# Altium PCB SPEC_A7_Management.PCBDOC (part 4 of 4)
Units mm, origin at the board's own origin, x right, y up, seen from the top; angles counter-clockwise.
Board outline 141.1 x 65.84 mm, 4 copper layers (Top Layer, Layer 1, Layer 2, Bottom Layer), stack 1.566 mm thick; 177 components, 176 nets, 698 pads, 409 vias.
Unrouted connection lines stored in the file: 4.
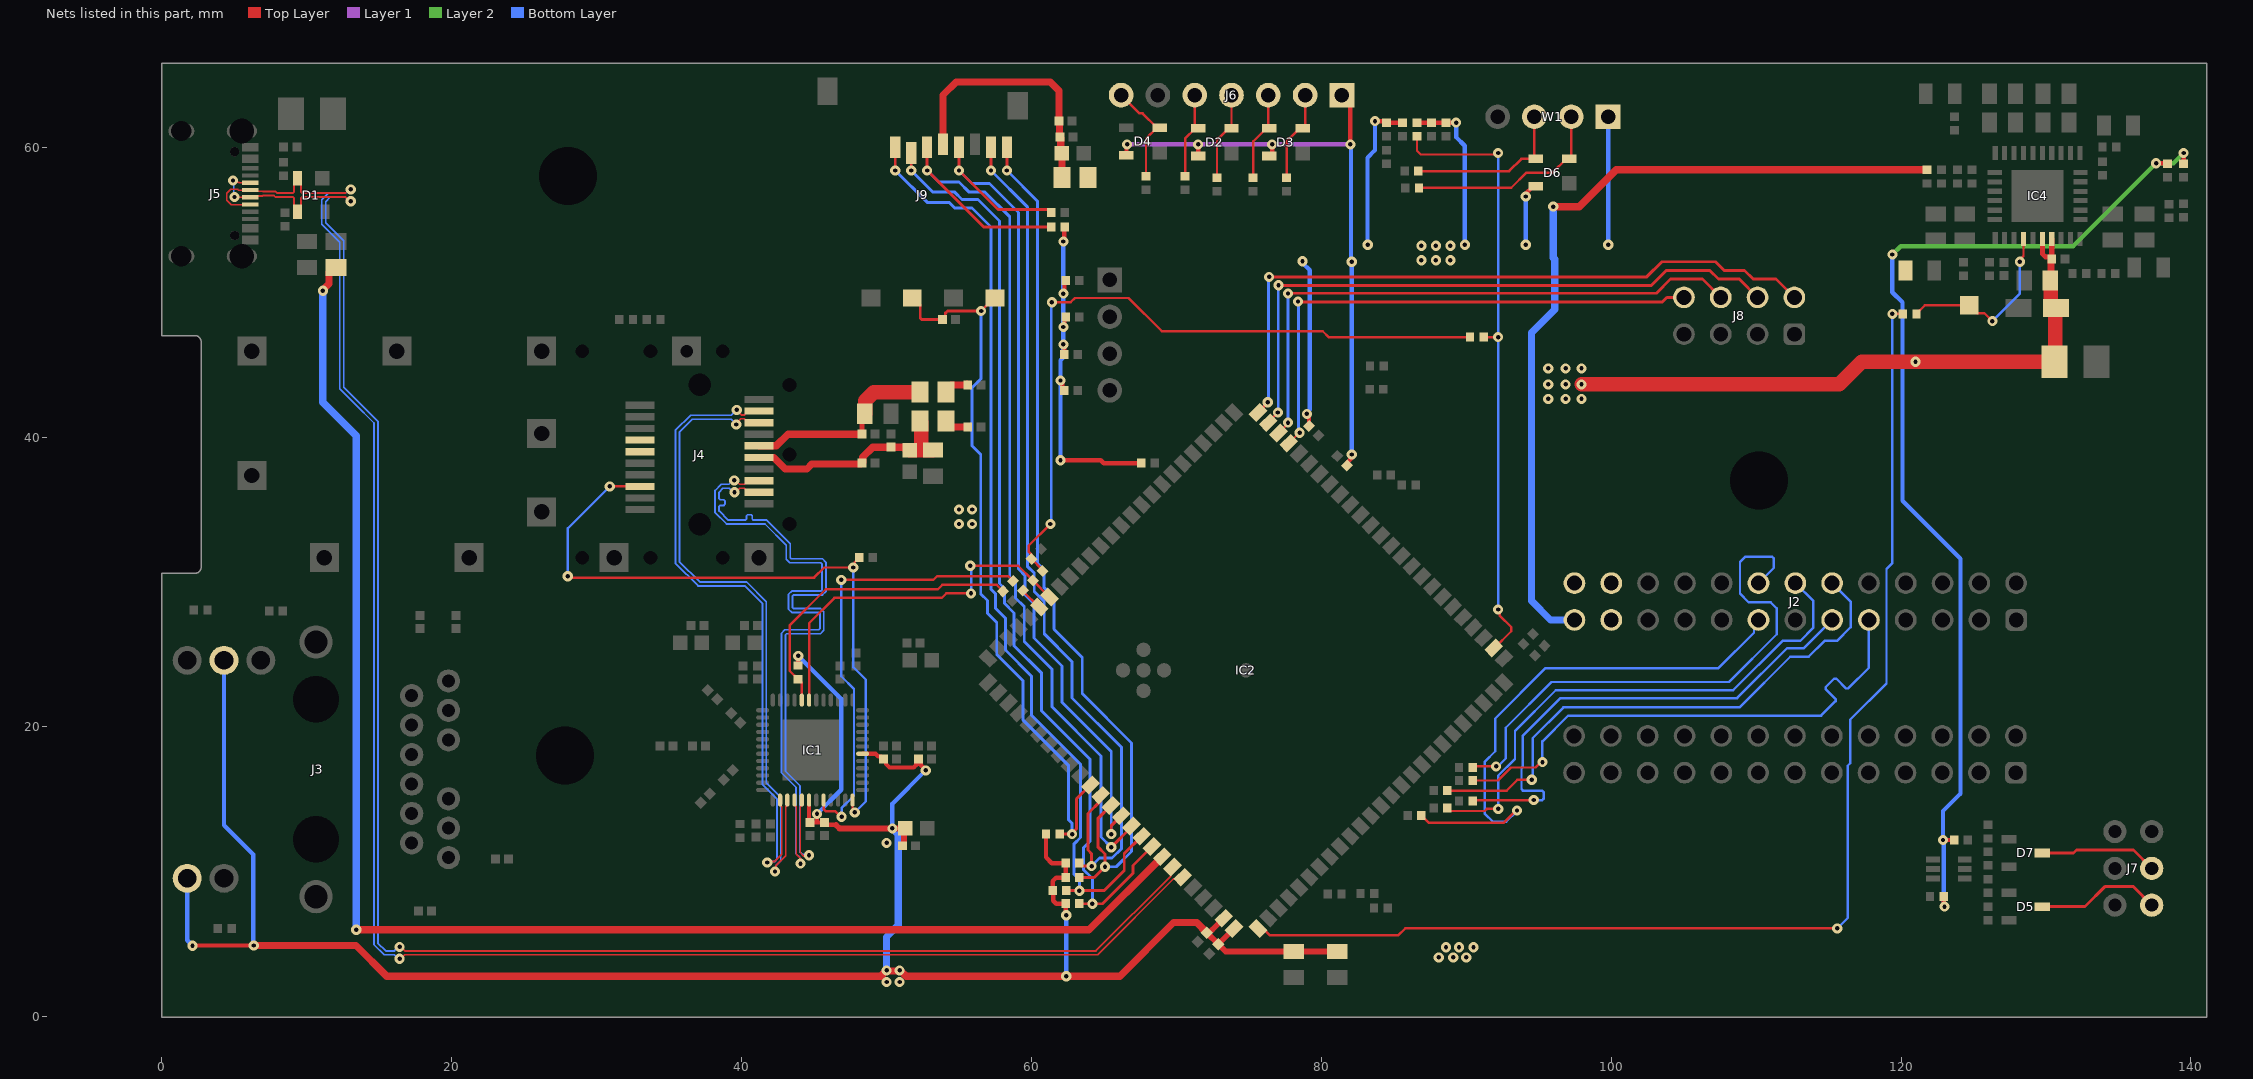
[diagram p5: the nets of this part, all layers, seen from the top]

## Via types
v1: diameter 0.7, hole 0.3, Top Layer to Bottom Layer, tented both sides, 409 vias

## Nets (pads, with @x,y where several pads share a name; then routed paths per layer and width w, separated by ;. In a path a pad name is that pad's centre, name@x,y a point inside that pad or via, vN(x,y) a via of type N, cw(c..) or ccw(c..) an arc to the next point about the centre after c; other vN are vias at no path point) (continued)
P3V3: C31.2 C34.2 J2.25 L1.1 L2.1 R38.2 | length 62.1
  Top Layer w0.5: L2.1@53.96,43.24 L2.1@54.1,43.1 54.1,43.25 54.45,43.6 C31.2@55.6,43.6 C31.2@55.54,43.66 ; L1.1@54.1,41.1 54.1,41.025 54.425,40.7 C34.2@55.6,40.7 ; v1(96,55.9) 97.8,55.9 100.34,58.44 R38.2@121.8,58.44
  Bottom Layer w0.5: v1(96,55.9) 96,52.373 96.1,52.273 96.1,48.8 94.5,47.2 94.5,28.7 95.815,27.385 97.462,27.385 J2.25@97.465,27.381
  other v1: 55,34 55.9,34 55,35 55.9,35
P3V3_SD: C42.2 C60.2 C61.2 J9.4 L4.2 | length 18.1
  Top Layer w0.5: J9.4@53.9,60.2 53.9,63.6 54.8,64.5 61.3,64.5 61.9,63.9 C61.2@61.9,61.8 61.925,61.775 61.925,60.725 C60.2@61.95,60.7 62.01,60.64 62.01,59.69 C42.2@62.1,59.6 L4.2@62.1,57.9
P3V3_SoM: C5.2 C6.2 C10.2 C11.2 C12.2 C13.2 C43.2 C44.2 C45.2 C46.2 D2.4 D3.4 D4.4 D6.4 IC1.18 IC1.30 IC2.49 IC2.50 J3.14 J3.16 J6.1 L4.1 R2.2 R7.2 R8.2 R17.1 R19.1 R20.1 R22.1 R23.1 R28.2 R29.2 R30.2 R31.2 R32.2 R35.2 R36.2 R50.2 R71.1 R72.2 R75.2 R79.2 R80.2 R81.2 R82.2 R83.2 W1.1 | length 357.6
  Top Layer w0.3: v1(2.1,4.9) 2.114,4.914 v1(6.333,4.914) ; R2.2@43.9,24.24 v1(43.9,24.9) ; IC1.18@44.65,14.95 44.65,13.45 C6.2@44.7,13.4 45.2,13.4 ; v1(45.2,14) 45.2,13.4 ; 46.5,13.24 45.86,13.24 C13.2@45.7,13.4 45.2,13.4 ; IC1.30@48.35,18.15 49.23,18.15 49.42,17.96 49.64,17.96 C5.2@49.8,17.8 ; C5.2@49.96,17.64 49.96,17.44 50.2,17.2 51.864,17.2 52.04,17.376 52.04,17.64 C12.2@52.2,17.8 52.36,17.64 52.36,17.376 52.7,17.036 v1(52.7,17) ; R71.1@61,12.6 61,11 61.4,10.6 R80.2@62.36,10.6 R81.2@62.36,9.6 61.7,9.6 61.46,9.36 R82.2@61.46,8.7 61.5,8.66 61.5,8 61.7,7.8 R83.2@62.36,7.8 62.36,7.04 v1(62.4,7) ; v1(62,38.4) 64.782,38.4 64.982,38.2 R23.1@67.56,38.2 ; v1(62,43.9) 62.12,43.78 62.12,43.34 R17.1@62.26,43.2 ; v1(62.2,46.4) 62.26,46.34 R19.1@62.26,45.7 ; v1(62.2,47.6) 62.277,47.677 62.277,48.217 R20.1@62.36,48.3 ; v1(62.2,49.9) 62.277,49.977 62.277,50.717 R22.1@62.36,50.8 ; v1(62.2,53.5) 62.25,53.55 62.25,54.45 R79.2@62.3,54.5 ; D4.4@66.55,59.45 66.55,60.15 v1(66.6,60.2) ; D2.4@71.5,59.4 v1(71.5,60.2) ; D3.4@76.4,59.4 76.45,59.4 76.6,59.55 v1(76.6,60.2) ; v1(79,41.6) 79,41.492 79.149,41.342 79.149,40.779 R8.2@79.135,40.765 ; J6.1@81.42,63.6 82,63.02 v1(82,60.2) ; R7.2@81.765,38.035 81.765,38.233 82.1,38.569 v1(82.1,38.8) ; v1(83.7,61.8) 84.4,61.8 R28.2@84.5,61.7 R29.2@85.6,61.7 ; R30.2@86.6,61.7 R31.2@87.6,61.7 R32.2@88.6,61.7 v1(89.3,61.7) ; v1(94.1,56.6) 94.1,56.8 94.6,57.3 D6.4@94.8,57.3 ; v1(122.9,12.2) R72.2@123.66,12.2 ; R75.2@122.94,8.3 122.94,7.66 v1(123,7.6) ; v1(137.6,58.9) 138.37,58.9 R35.2@138.4,58.87 ; R36.2@139.5,58.87 v1(139.5,59.6)
  Top Layer w0.4: 46.5,13.24 46.512,13.24 46.752,13 C10.2@51.3,13 51.2,12.9 51.2,11.9 C11.2@51.1,11.8 ; 72.448,5.993 72.256,5.8 C43.2@72.1,5.8 C44.2@72.9,5 ; 72.449,5.993 IC2.49@73.262,6.806 ; IC2.50@73.969,6.099 73.969,6.084 72.9,5.015 C44.2@72.9,5 ; C46.2@81.1,4.5 C45.2@78.1,4.5 73.4,4.5 C44.2@72.9,5
  Top Layer w0.5: v1(6.333,4.914) 13.386,4.914 15.5,2.8 49.6,2.8 v1(50,3.2) 50.038,3.162 50.988,3.162 51.35,2.8 v1(62.4,2.8) 66.1,2.8 69.8,6.5 71.4,6.5 C43.2@72.1,5.8
  Layer 1 w0.3: v1(66.6,60.2) v1(71.5,60.2) v1(76.6,60.2) v1(82,60.2)
  Layer 2 w0.3: v1(119.4,52.6) 119.975,53.175 131.875,53.175 v1(137.6,58.9) 138.8,58.9 v1(139.5,59.6)
  Bottom Layer w0.3: J3.14@1.74,9.555 1.74,5.276 2.1,4.916 v1(2.1,4.9) ; J3.16@4.28,24.595 4.28,13.22 6.3,11.2 6.3,5 6.333,4.967 v1(6.333,4.914) ; v1(43.9,24.9) 46.866,21.934 46.866,15.666 v1(45.2,14) ; v1(50.4,13) 50.4,14.7 v1@52.684,16.984 ; v1(62,38.4) v1(62,43.9) 62,45.3 62.2,45.5 v1(62.2,46.4) v1(62.2,47.6) v1(62.2,49.9) v1(62.2,53.5) ; v1(62.4,2.8) v1(62.4,7) ; v1(78.7,52.13) 78.7,52.022 79.2,51.522 79.2,41.908 79,41.708 v1(79,41.6) ; v1(82,60.2) 82.05,60.15 82.05,52.15 v1(82.1,52.1) v1(82.1,38.8) ; v1(83.2,53.27) 83.18,53.29 83.18,59.28 83.7,59.8 v1(83.7,61.8) ; v1(89.3,61.7) 89.3,60.7 89.9,60.1 v1(89.9,53.27) ; v1(94.1,53.27) v1(94.1,56.6) ; W1.1@99.78,62.1 99.8,62.08 v1(99.8,53.27) ; v1(119.4,52.6) 119.4,50 120.1,49.3 120.1,35.6 124.1,31.6 124.1,15.4 122.9,14.2 v1(122.9,12.2) 122.95,12.15 122.95,7.65 v1(123,7.6)
  Bottom Layer w0.5: v1(50,3.2) 50,5.5 50.811,6.311 50.811,12.589 v1(50.4,13)
  other v1: 50,2.4 50.9,2.4 50.9,3.2 88.1,4.1 89.1,4.1 90,4.1 88.6,4.8 89.5,4.8 90.5,4.8 50,12 86.9,52.2 87.9,52.2 88.9,52.2 86.9,53.2 87.9,53.2 88.9,53.2
P5V_USB: IC2.43 L3.1 | length 104.8
  Top Layer w0.5: v1(11.1,50.1) 11.1,50.154 11.525,50.579 11.525,51.375 11.85,51.7 L3.1@12,51.7 ; v1(13.4,6) 63.971,6 IC2.43@69.019,11.048
  Bottom Layer w0.5: v1(11.1,50.1) 11.1,42.4 13.4,40.1 v1(13.4,6)
P12V0: C49.1 C50.1 C51.2 C52.2 IC4.28 IC4.29 J2.23 J2.24 J2.26 | length 44
  Top Layer w0.35: IC4.28@129.75,53.675 129.75,52.65 129.965,52.435 130.265,52.435 C52.2@130.4,52.3 130.4,53.362 IC4.29@130.4,53.675
  Top Layer w0.5: C51.2@130.3,50.8 130.35,50.85 130.35,52.25 C52.2@130.4,52.3
  Top Layer w1: v1(97.952,43.639) 115.739,43.639 117.3,45.2 v1(121,45.2) C49.1@130.6,45.2 130.65,45.25 130.65,48.85 C50.1@130.7,48.9 130.45,48.9 130.325,49.025 130.325,50.775 C51.2@130.3,50.8
  other v1: 95.652,42.639 96.852,42.639 97.952,42.639 95.652,43.639 96.852,43.639 95.652,44.739 96.852,44.739 97.952,44.739
P12V_A: D5.3 J7.1 | length 8.7
  Top Layer w0.2: D5.3@129.75,7.6 132.696,7.6 134.096,9 136,9 J7.1@137.3,7.7
P12V_B: D7.3 J7.3 | length 8.2
  Top Layer w0.2: D7.3@129.75,11.3 131.9,11.3 132.1,11.5 136.04,11.5 J7.3@137.3,10.24
PHY1_RSTn: IC1.43 IC2.19 R24.1 | length 25.6
  Top Layer w0.166: IC1.43@44.65,21.85 44.65,27.15 46.4,28.9 53.804,28.9 54.121,29.217 v1(55.829,29.217) ; v1(55.771,31.117) 59.083,31.117 R24.1@60.1,30.1 61.227,28.973 IC2.19@61.241,28.973
  Bottom Layer w0.166: v1(55.771,31.117) 55.829,31.059 v1(55.829,29.217)
PHY2_RSTn: IC2.77 R25.1 R30.1 | length 42.8
  Top Layer w0.166: R30.1@86.6,60.76 86.6,59.761 86.861,59.5 92.1,59.5 v1(92.2,59.6) ; R25.1@91.2,46.9 v1(92.2,46.9) ; IC2.77@91.894,25.438 91.938,25.438 93.1,26.6 93.1,26.893 92.302,27.69 92.302,27.998 v1(92.2,28.1)
  Bottom Layer w0.166: v1(92.2,28.1) v1(92.2,46.9) v1(92.2,59.6)
PHY_CLK: IC2.20 R21.1 | length 1.6
  Top Layer w0.166: R21.1@59.4,29.4 59.4,29.387 60.52,28.266 IC2.20@60.534,28.266
PHY_CLKX: IC1.20 R21.2 | length 31.3
  Top Layer w0.166: IC1.20@45.65,14.95 45.65,14.332 45.814,14.169 46.467,14.169 46.834,13.802 v1@46.898,13.802 ; v1(46.869,30.145) 53.224,30.145 53.478,30.4 58.4,30.4 R21.2@58.735,30.065
  Bottom Layer w0.166: v1(46.869,30.145) 46.869,23.494 47.753,22.61 47.753,15.253 46.9,14.4 v1(46.9,13.8)
PHY_INTn: IC1.44 R2.1 R18.2 | length 21.6
  Top Layer w0.166: IC1.44@44.15,21.85 44.15,23.05 44.127,23.073 44.127,23.093 43.92,23.3 R2.1@43.9,23.3 43.88,23.3 43.304,23.876 43.304,27.004 45.8,29.5 53.537,29.5 53.837,29.8 57.6,29.8 R18.2@58.035,29.365
PHYX_RSTn: R24.2 R25.2 R63.2 | length 49.7
  Top Layer w0.166: R24.2@60.765,30.765 60.765,30.835 R63.2@60,31.6 60,31.893 59.8,32.093 59.8,32.5 v1(61.3,34) ; v1(61.404,49.3) 62.7,49.3 63,49.6 66.7,49.6 69,47.3 80.1,47.3 80.5,46.9 R25.2@90.26,46.9
  Bottom Layer w0.166: v1(61.3,34) 61.352,34.052 61.352,49.248 v1(61.404,49.3)
PWR_GOOD: IC4.26 R27.1 TP1.1 | length 12.5
  Top Layer w0.166: R27.1@121.07,48.5 121.07,48.52 121.65,49.1 TP1.1@124.7,49.1 125.252,48.548 125.752,48.548 v1(126.3,48) ; v1(128.2,52.1) 128.2,52.244 128.45,52.494 IC4.26@128.45,53.675
  Bottom Layer w0.166: v1(126.3,48) 128.2,49.9 v1(128.2,52.1)
SC_MISO: IC2.98 J8.6 | length 40.7
  Top Layer w0.2: IC2.98@77.045,40.287 77.7,40.942 v1(77.7,41) ; v1(77.702,49.903) 77.721,49.922 103.122,49.922 104.1,50.9 106.3,50.9 J8.6@107.56,49.64
  Bottom Layer w0.2: v1(77.7,41) 77.701,41.001 v1(77.702,49.903) v1(77.702,49.903)
SC_MOSI: IC2.99 J8.4 | length 44
  Top Layer w0.2: IC2.99@76.338,40.994 76.338,41.038 v1(77,41.7) ; v1(77.045,50.473) 102.773,50.473 103.8,51.5 106.8,51.5 107.4,50.9 108.84,50.9 J8.4@110.1,49.64
  Bottom Layer w0.2: v1(77,41.7) 77.023,41.723 77.023,50.45 v1(77.045,50.473)
SC_SCLK: IC2.100 J8.2 | length 47.4
  Top Layer w0.2: IC2.100@75.631,41.701 76.3,42.371 v1(76.3,42.4) ; v1(76.396,51.057) 102.457,51.057 103.5,52.1 107.2,52.1 107.8,51.5 109.2,51.5 109.8,50.9 111.38,50.9 J8.2@112.64,49.64
  Bottom Layer w0.2: v1(76.3,42.4) 76.348,42.448 76.348,51.009 v1(76.396,51.057)
SC_SSEL: IC2.97 J8.8 | length 36.9
  Top Layer w0.166: IC2.97@77.752,39.58 78.3,40.128 78.3,40.203 78.396,40.298 v1(78.498,40.298)
  Top Layer w0.2: v1(78.392,49.352) 78.41,49.333 103.533,49.333 103.84,49.64 J8.8@105.02,49.64
  Bottom Layer w0.2: v1(78.392,49.352) 78.43,49.313 78.43,40.367 v1(78.498,40.298)
SD_CD: C62.2 IC2.36 J9.10 R71.2 | length 51.6
  Top Layer w0.2: J9.10@51.77,49.6 51.82,49.6 52.32,49.1 52.32,48.217 52.437,48.1 C62.2@53.85,48.1 54.047,48.297 54.047,48.547 54.2,48.7 v1(56.52,48.7) 57.42,49.6 J9.10@57.47,49.6 ; R71.2@61.94,12.6 v1(62.8,12.6) 62.8,12.658 63.109,12.967 63.109,15.037 IC2.36@64.07,15.998
  Bottom Layer w0.2: v1(56.52,48.7) 56.52,44.02 55.9,43.4 55.9,39.4 56.5,38.8 56.5,29.171 56.953,28.718 56.953,27.847 57.6,27.2 57.6,25 59.4,23.2 59.4,20.5 62.54,17.36 62.54,13.617 62.8,13.357 v1(62.8,12.6)
SD_CLK: IC2.39 J9.5 R78.1 | length 61.8
  Top Layer w0.2: J9.5@55,60 v1(55,58.4) 57.69,55.71 61.17,55.71 61.2,55.68 61.2,55.4 61.3,55.5 R78.1@61.36,55.5 ; v1(65.5,12.6) 65.5,13.186 IC2.39@66.191,13.877
  Bottom Layer w0.2: v1(55,58.4) 55.9,57.5 57.1,57.5 59.1,55.5 59.1,30.9 59.563,30.437 59.563,29.093 60.171,28.485 60.171,26.129 62.1,24.2 62.1,21.7 65.5,18.3 v1(65.5,12.6)
SD_CMD: IC2.40 J9.3 R79.1 | length 67.2
  Top Layer w0.2: J9.3@52.8,60 v1(52.8,58.4) 56.7,54.5 R79.1@61.36,54.5 ; v1(65.5,11.7) 66.898,13.098 IC2.40@66.898,13.17
  Bottom Layer w0.2: v1(52.8,58.4) 53.6,57.6 55,57.6 55.7,56.9 56.8,56.9 58.5,55.2 58.5,30.3 58.9,29.9 58.9,28.9 59.5,28.3 59.5,25.9 61.4,24 61.4,21.4 64.8,18 64.8,12.4 v1(65.5,11.7)
SD_D0: IC2.37 J9.7 R80.1 | length 61
  Top Layer w0.2: v1(57.2,58.4) J9.7@57.2,60 ; R80.1@63.3,10.6 63.3,10.581 63.49,10.391 v1(64.147,10.391) 64.147,11.253 63.9,11.5 63.9,14.025 64.777,14.902 IC2.37@64.777,15.291
  Bottom Layer w0.2: v1(57.2,58.4) 59.711,55.889 59.711,31.089 60.189,30.611 60.189,29.34 60.877,28.652 60.877,26.423 62.8,24.5 62.8,22 66.2,18.6 66.2,11.594 65.552,10.946 64.701,10.946 v1(64.147,10.391)
SD_D1: IC2.38 J9.8 R81.1 | length 61.3
  Top Layer w0.2: v1(58.3,58.4) J9.8@58.3,60 ; R81.1@63.3,9.6 64.325,9.6 v1(65.074,10.348) 65.074,11.226 64.6,11.7 64.6,13.7 IC2.38@65.484,14.584
  Bottom Layer w0.2: v1(58.3,58.4) 60.422,56.278 60.422,31.294 60.85,30.866 60.85,29.632 61.556,28.926 61.556,26.744 63.5,24.8 63.5,22.3 66.9,18.9 66.9,11.4 65.848,10.348 v1(65.074,10.348)
SD_D2: IC2.41 J9.1 R82.1 | length 65.9
  Top Layer w0.2: v1(50.6,58.4) J9.1@50.6,60 ; R82.1@62.4,8.7 v1(63.3,8.7) 65.006,8.7 66.4,10.094 66.4,11.257 IC2.41@67.605,12.463
  Bottom Layer w0.2: v1(50.6,58.4) 52.8,56.2 54.3,56.2 54.7,55.8 55.9,55.8 57.2,54.5 57.2,29.5 57.502,29.198 57.502,28.198 58.2,27.5 58.2,25.3 60,23.5 60,20.8 63.37,17.43 63.37,12.364 62.944,11.938 62.944,9.806 63.3,9.45 v1(63.3,8.7)
SD_D3: IC2.42 J9.2 R83.1 | length 65.9
  Top Layer w0.2: v1(51.7,58.4) J9.2@51.7,59.6 ; R83.1@63.3,7.8 v1(64.2,7.8) 64.9,7.8 67,9.9 67,10.443 IC2.42@68.312,11.755
  Bottom Layer w0.2: v1(51.7,58.4) 53.2,56.9 54.7,56.9 55.2,56.4 56.3,56.4 57.8,54.9 57.8,29.9 58.136,29.564 58.136,28.534 58.8,27.87 58.8,25.6 60.7,23.7 60.7,21.1 64.046,17.754 64.046,12.121 63.577,11.651 63.577,10.155 64.2,9.532 v1(64.2,7.8)
SFP_LOS: IC1.24 J4.8 R11.2 | length 48.9
  Top Layer w0.166: v1(28,30.4) 28.1,30.3 45,30.3 45.7,31 v1(47.7,31) 47.802,31.102 47.802,31.382 48.1,31.68 R11.2@48.1,31.7 ; v1(30.9,36.6) 32.995,36.6 J4.8@33,36.595 ; IC1.24@47.65,14.95 47.65,14.25 v1(47.8,14.1)
  Bottom Layer w0.166: v1(28,30.4) 28,33.7 v1(30.9,36.6) ; v1(47.7,31) 47.7,24.127 48.573,23.254 48.573,14.873 v1(47.8,14.1)
SFP_MOD_DEF1: J4.5
SFP_MOD_DEF2: J4.4
SFP_VCCR: C32.2 C33.2 C35.2 C36.2 J4.15 L1.2 | length 15.3
  Top Layer w0.5: J4.15@41.2,38.595 42.205,38.595 43,37.8 44.5,37.8 44.84,38.14 48.24,38.14 48.36,38.26 48.36,38.618 49.042,39.3 C36.2@50.3,39.3 51.4,39.3 C35.2@51.6,39.1
  Top Layer w1: C35.2@51.6,39.1 52.375,39.1 ; L1.2@52.3,41.1 52.375,41.025 52.375,39.1 ; C32.2@53.2,39.1 52.375,39.1
SFP_VCCT: C37.2 C38.2 J4.16 L2.2 | length 13.9
  Top Layer w0.35: C38.2@48.3,40.2 48.3,41.4 C37.2@48.5,41.6
  Top Layer w0.5: J4.16@41.2,39.395 42.395,39.395 43.2,40.2 C38.2@48.3,40.2
  Top Layer w1: C37.2@48.5,41.6 48.525,41.625 48.525,42.514 49.111,43.1 L2.2@52.3,43.1
SFPRX_N: IC1.17 J4.12 | length 46.8
  Top Layer w0.123: v1(39.51,36.194) 39.597,36.194 39.871,36.467 40.181,36.467 40.262,36.386 40.262,36.383 40.45,36.195 J4.12@41.2,36.195 ; IC1.17@44.15,14.95 44.15,14.603 44.036,14.489 44.036,11.336 44.293,11.08
  Bottom Layer w0.123: v1(39.51,36.194) 39.423,36.194 39.149,36.467 38.706,36.467 38.439,36.2 38.439,35.753 38.511,35.681 38.774,35.681 38.846,35.609 38.846,35.358 38.774,35.286 38.511,35.286 38.439,35.214 38.439,34.903 39.07,34.273 40.259,34.273 40.331,34.345 40.331,34.562 40.403,34.634 40.664,34.634 40.736,34.562 40.736,34.345 40.809,34.273 41.72,34.273 43.355,32.638 43.355,31.672 43.427,31.6 45.579,31.6 45.811,31.368 45.811,29.332 45.579,29.1 43.578,29.1 43.506,29.028 43.506,28.245 43.578,28.173 45.437,28.173 45.669,27.941 45.669,26.659 45.437,26.427 43.094,26.427 43.022,26.355 43.022,16.945 44.024,15.944 44.024,11.376 44.195,11.205 44.582,11.205 v1(44.643,11.143)
SFPRX_P: IC1.16 J4.13 | length 46.9
  Top Layer w0.123: v1(39.487,37.014) 39.574,37.014 39.848,36.74 40.195,36.74 40.45,36.995 J4.13@41.2,36.995 ; IC1.16@43.65,14.95 43.65,14.603 43.763,14.489 43.763,11.223 44.107,10.88 44.107,10.607 v1(44.064,10.564)
  Bottom Layer w0.123: v1(39.487,37.014) 39.4,37.014 39.126,36.74 38.593,36.74 38.166,36.314 38.166,34.79 38.956,34 41.607,34 43.082,32.525 43.082,31.559 43.314,31.327 45.466,31.327 45.538,31.255 45.538,29.445 45.466,29.373 43.465,29.373 43.233,29.141 43.233,28.132 43.465,27.9 45.324,27.9 45.396,27.828 45.396,26.772 45.324,26.7 42.981,26.7 42.749,26.468 42.749,16.832 43.751,15.831 43.751,11.263 44.002,11.012 44.002,10.625 v1(44.064,10.564)
SFPTX_N: IC1.14 J4.19 | length 46.8
  Top Layer w0.123: v1(39.655,41.877) 39.655,41.84 39.964,41.531 40.189,41.531 40.262,41.604 40.262,41.607 40.45,41.795 J4.19@41.2,41.795 ; v1(41.764,10.648) 41.825,10.708 42.248,10.708 42.764,11.224 42.764,14.205 ; IC1.14@42.65,14.95 42.65,14.603 42.763,14.489 42.763,14.205
  Bottom Layer w0.123: v1(39.655,41.877) 39.64,41.877 39.273,41.51 36.48,41.51 35.429,40.46 35.429,31.297 36.995,29.731 40.222,29.731 41.428,28.524 41.428,16.041 42.43,15.04 42.43,10.869 42.269,10.708 41.825,10.708 v1(41.764,10.648)
SFPTX_P: IC1.15 J4.18 | length 46.9
  Top Layer w0.123: v1(39.624,40.871) 39.624,40.95 39.932,41.259 40.189,41.259 40.262,41.186 40.262,41.183 40.45,40.995 J4.18@41.2,40.995 ; v1(42.299,10.02) 42.378,10.099 42.378,10.452 43.037,11.111 43.037,14.318 43.036,14.489 43.15,14.603 IC1.15@43.15,14.95
  Bottom Layer w0.123: v1(39.624,40.871) 39.624,40.887 39.273,41.237 36.593,41.237 35.702,40.346 35.702,31.41 37.108,30.004 40.335,30.004 41.701,28.637 41.701,16.154 42.703,15.153 42.703,10.756 42.388,10.442 42.388,10.109 v1(42.299,10.02)
SoM_RSTn: IC2.51 R27.2 | length 85.1
  Top Layer w0.166: IC2.51@75.631,6.099 75.981,6.099 76.466,5.614 85.3,5.614 85.786,6.1 v1(115.6,6.1) ; v1(119.4,48.5) R27.2@120.13,48.5
  Bottom Layer w0.166: v1(115.6,6.1) 116.324,6.824 116.324,17.324 116.5,17.5 116.5,20.5 119,23 119,30.9 119.4,31.3 v1(119.4,48.5)
TRGMII_TX_CLK: J2.15 R70.1 | length 38.1
  Top Layer w0.166: R70.1@86.9,13.9 87.4,13.4 92.594,13.4 93.421,14.227 v1(93.498,14.227)
  Bottom Layer w0.166: v1(93.498,14.227) 93.498,14.203 92.761,13.465 91.824,13.465 91.286,14.003 91.286,17.605 91.998,18.317 91.998,20.574 95.478,24.054 107.404,24.054 109.852,26.503 109.852,27.069 J2.15@110.165,27.381
TRGMII_TX_EN: J2.16 R69.1 | length 37.6
  Top Layer w0.166: R69.1@90.44,17.2 90.515,17.275 v1(92.058,17.275)
  Bottom Layer w0.166: v1(92.058,17.275) 92.175,17.275 92.721,17.821 92.721,19.94 95.878,23.097 108.128,23.097 111.421,26.39 111.421,28.179 111,28.6 109.485,28.6 108.889,29.196 108.889,31.376 109.242,31.729 111.111,31.729 111.223,31.617 111.223,30.979 J2.16@110.165,29.921
TRGMII_TXD0: J2.9 R60.1 | length 36.8
  Top Layer w0.166: R60.1@90.44,16.3 92.18,16.3 93.08,17.2 94.779,17.2 95.151,17.572 v1(95.255,17.572)
  Bottom Layer w0.166: v1(95.255,17.572) 95.255,19 97.039,20.783 114.483,20.783 115.481,21.781 115.481,21.919 114.795,22.605 114.795,22.742 115.388,23.335 115.526,23.335 116.212,22.649 116.349,22.649 117.785,24.085 J2.9@117.785,27.381
TRGMII_TXD1: J2.12 R66.1 | length 37.7
  Top Layer w0.166: R66.1@88.7,15.6 92.782,15.6 93.532,16.35 v1(94.522,16.35)
  Bottom Layer w0.166: v1(94.522,16.35) 94.587,16.415 94.587,19.235 96.703,21.351 108.863,21.351 112.352,24.84 113.621,24.84 114.721,25.94 115.583,25.94 116.521,26.878 116.521,28.645 J2.12@115.245,29.921
TRGMII_TXD2: J2.11 R67.1 | length 35.4
  Top Layer w0.166: R67.1@90.44,14.9 90.492,14.952 v1(94.659,14.952)
  Bottom Layer w0.166: v1(94.659,14.952) 95.238,14.952 95.336,15.05 95.336,15.509 95.238,15.607 93.91,15.607 93.812,15.704 93.812,17.155 93.886,17.229 93.886,19.381 96.49,21.985 108.69,21.985 112.146,25.44 113.304,25.44 J2.11@115.245,27.381
TRGMII_TXD3: J2.14 R68.1 | length 36.6
  Top Layer w0.166: R68.1@88.7,14.4 88.9,14.2 91.28,14.2 91.425,14.345 v1(92.205,14.345)
  Bottom Layer w0.166: v1(92.205,14.345) 92.205,16.64 93.361,17.795 93.361,19.716 96.175,22.53 108.411,22.53 111.821,25.94 113.041,25.94 113.949,26.849 113.949,28.677 J2.14@112.705,29.921
USB_D_N: D1.3 IC2.44 J5.A7 J5.B7 | length 125.2
  Top Layer w0.123: v1(4.9,57.7) 5.01,57.59 5.299,57.59 5.338,57.55 J5.B7@6.39,57.55 ; v1(5,56.563) 5.006,56.556 6.384,56.556 6.39,56.55 6.478,56.638 6.951,56.638 6.976,56.664 7.724,56.664 7.824,56.564 9.039,56.564 9.112,56.491 9.112,55.788 D1.3@9.35,55.55 9.588,55.788 9.588,56.5 9.661,56.572 12.638,56.572 12.937,56.273 v1(13.024,56.273) ; v1(16.4,4.82) 16.487,4.82 16.761,4.547 64.446,4.547 69.603,9.703 69.603,10.217 IC2.44@69.727,10.341
  Bottom Layer w0.123: v1(4.9,57.7) 4.95,57.65 4.95,56.613 v1(5,56.563) ; v1(13.024,56.273) 12.936,56.273 12.664,56.545 11.595,56.545 11.3,56.25 11.3,54.8 12.543,53.557 12.543,43.443 14.9,41.086 14.9,27.473 14.9,5.086 15.44,4.547 16.039,4.547 16.313,4.82 v1(16.4,4.82)
USB_D_P: D1.2 IC2.45 J5.A6 J5.B6 | length 126.3
  Top Layer w0.123: J5.B6@6.09,56.05 6.068,56.028 4.774,56.028 4.468,56.334 4.468,56.823 4.739,57.094 5.22,57.094 5.277,57.037 6.077,57.037 J5.A6@6.09,57.05 ; J5.A6@6.309,57.131 6.478,56.962 6.951,56.962 6.976,56.937 7.837,56.937 7.937,56.837 9.039,56.837 9.112,56.909 9.112,57.612 D1.2@9.35,57.85 9.588,57.612 9.588,56.917 9.661,56.845 12.664,56.845 12.911,57.093 v1(13.024,57.093) ; v1(16.4,4) 16.487,4 16.761,4.274 64.559,4.274 69.796,9.51 70.31,9.51 IC2.45@70.434,9.634
  Bottom Layer w0.123: v1(13.024,57.093) 12.937,57.093 12.662,56.818 11.482,56.818 11.027,56.363 11.027,54.687 12.27,53.444 12.27,43.33 13.303,42.297 14.627,40.973 14.627,4.973 15.326,4.274 16.039,4.274 16.313,4 v1(16.4,4)
XCONSOLE_RX: D6.2 R57.2 W1.2 | length 14.1
  Top Layer w0.166: R57.2@86.74,57.2 93.1,57.2 94.15,58.25 95.95,58.25 96.9,59.2 D6.2@97.1,59.2 97.24,59.34 W1.2@97.24,62.1
XCONSOLE_TX: D6.3 R58.1 W1.3 | length 11.4
  Top Layer w0.166: R58.1@86.693,58.353 92.953,58.353 93.8,59.2 D6.3@94.8,59.2 94.7,59.3 W1.3@94.7,62.1
XJTAG_TCK: D2.3 J6.5 R53.1 | length 6.2
  Top Layer w0.166: R53.1@70.6,58 70.6,60.6 71.3,61.3 D2.3@71.477,61.3 ; J6.5@71.26,63.6 71.26,61.517 D2.3@71.477,61.3 ; D2.3@71.5,61.3 D2.3@71.477,61.3
XJTAG_TDI: D3.3 J6.3 R55.1 | length 6.3
  Top Layer w0.166: R55.1@75.3,57.9 75.3,60.4 76.2,61.3 D3.3@76.4,61.3 76.34,61.36 J6.3@76.34,63.6
XJTAG_TDO: D4.2 J6.7 R54.2 | length 7.3
  Top Layer w0.166: J6.7@66.18,63.6 67.447,62.333 67.667,62.333 D4.2@68.65,61.35 ; R54.2@67.9,58 67.9,60.6 D4.2@68.65,61.35 ; D4.2@68.85,61.35 D4.2@68.65,61.35
XJTAG_TMS: D2.2 J6.4 R3.2 | length 6.3
  Top Layer w0.166: R3.2@72.8,57.9 72.8,60.5 D2.2@73.8,61.5 ; D2.2@73.8,61.3 D2.2@73.8,61.5 ; J6.4@73.8,63.6 D2.2@73.8,61.5
XJTAG_TRST_B: D3.2 J6.2 R56.2 | length 6.3
  Top Layer w0.166: R56.2@77.6,57.9 77.6,60.4 78.5,61.3 D3.2@78.7,61.3 78.88,61.48 J6.2@78.88,63.6
pads on no net: B1.1 B2.1 B3.1 CageBot1.32 CageBot1.33 CageBot1.34 CageBot1.35 CageBot1.36 CageBot1.37 CageTop1.32 CageTop1.33 CageTop1.34 D4.3 D5.2 D7.2 IC1.19 IC1.21 IC1.22 IC1.23 IC1.40 IC2.4 IC2.10 IC2.11 IC2.12 IC2.13 IC2.14 IC2.46 IC2.47 IC2.48 IC2.57 IC2.58 IC2.59 IC2.60 IC2.61 IC2.62 IC2.78 IC2.79 IC2.80 IC2.81 IC2.82 IC2.83 IC2.84 IC2.85 IC2.86 IC2.87 IC2.88 IC4.11 IC4.12 J3.20 J3.21 J4.MTG1 J4.MTG2 J5. J5.A8 J5.B8 J7.2 J7.4 J7.5

## Polygon pours and split planes (outlines as drawn)
P12V0 on Top Layer "Top Layer-P12V0" (solid, pour order 80): 116.9,42.2 118.3,43.6 131.8,43.6 132,43.8 132,50 130.9,51.1 130.9,51.6 130.7,51.8 130.7,53 130.5,53.2 129.6,53.2 129.5,53.1 129.5,47.4 129.2,47.1 116.3,47.1 114.3,45.1 95.3,45.1 95.1,44.9 95.1,42.5 95.4,42.2 102.4,42.2
P3V3_SoM on Top Layer "Top Layer-P3V3_SoM 1" (solid, pour order 95): 116.4,52.8 118.8,50.4 120.7,50.4 121,50.7 121,53.3 118,56.3 99.5,56.3 97.7,54.5 65.174,54.5 65,54.674 65,57.9 66,58.9 66.9,58.9 67.1,59.1 67.1,60.4 66.9,60.6 65.8,60.6 65.4,60.2 65.4,59.3 64.9,58.8 63.3,58.8 63.1,58.6 63.1,55.025 62.575,54.5 62.5,54.5 61.7,53.7 61.7,52.8 62.2,52.3 66.7,52.3 67.5,51.5 100.9,51.5 102.2,52.8
P3V3_SD on Top Layer "P3V3_SD_L01_P086" (solid, pour order 86): 62.6,56.7 63,57.1 63,58.7 62.3,59.4 62.3,64.8 61.8,65.3 53.7,65.3 52.6,64.2 52.6,62.3 53.9,61 56.9,64 60.2,64 60.7,63.5 60.7,57.2 61.2,56.7
P3V3_SoM on Top Layer "P3V3_SOM_L01_P071" (solid, pour order 71): 52.9,16.6 53.096,16.796 53.096,17.304 53.01,17.39 52.739,17.39 52.5,17.629 52.5,18.1 51.9,18.1 51.902,18.098 51.902,17.587 51.615,17.3 50.271,17.3 50.079,17.493 50.1,17.514 50.1,18.1 50.08,18.12 49.47,18.12 49.286,18.303 48.421,18.303 48.421,18.012 48.413,18.003 48.995,18.003 50.398,16.6 51.5,16.6
SFP_VCCT on Top Layer "SFP_VCCT_L01_P069" (solid, pour order 69): 48.694,41.751 48.694,39.763 48.231,39.3 42.694,39.3 42.494,39.1 41.494,39.1 41.494,39.6 42.194,39.6 44.345,41.751
SFP_VCCR on Top Layer "SFP_VCCR_L01_P070" (solid, pour order 70): 50,39.6 48.802,39.6 48.202,39 44.7,39 43.8,38.1 43.1,38.1 42.3,38.9 41.6,38.9 41.5,38.8 41.5,38.5 41.7,38.3 42.1,38.3 43.2,37.2 48.2,37.2 48.5,37.5 48.5,38.4 49.2,39.1 50,39.1
P3V3_SoM on Top Layer "Top Layer-P3V3_SoM" (solid, remove dead copper, pour order 61): 44.5,13 46.5,13 48.031,11.469 50.3,11.469 50.542,11.711 50.542,12.307 50.735,12.5 51.5,12.5 51.5,13.5 47.5,13.5 47.24,13.24 46.76,13.24 46.5,13.5 46,14 45.5,14 45.3,14.2 44.65,14.2 44.5,14.05
P1V1 on Top Layer "P1V1_L01_P050" (solid, remove dead copper, pour order 50): 51.8,26.6 51.4,27 50,27 49.7,26.7 49.7,25 49.1,24.4 49.1,24 49.3,23.8 51.8,23.8 52.1,24.1 52.1,25.1 51.8,25.4 51.8,25.5
P1V8 on Top Layer "Top Layer-P1V8" (solid, remove dead copper, pour order 46): 38.7,24.9 39.7,24.9 40.1,25.3 40.1,26.3 39.7,26.7 39.7,28.3 39.2,28.8 26.1,28.8 25.5,28.2 25.5,27.5 26.1,26.9 27.8,26.9 28.5,27.6 38,27.6 38.1,27.5 38.1,26.7 38.5,26.3 38.5,25.1
P1V8 on Top Layer "P1V8_L01_P040" (solid, remove dead copper, pour order 40): 42.075,13.375 40.725,13.375 40.5,13.6 40.5,14.7 40.895,15.095 42.005,15.095 42.15,14.95 42.15,13.45
P2V5 on Top Layer "P2V5_L01_P034" (solid, remove dead copper, pour order 34): 38,24.3 38.2,24.5 38.2,26.2 37.9,26.5 36.9,26.5 36.6,26.2 36.6,24.6 36.9,24.3
P2V5 on Top Layer "Top Layer-P2V5" (solid, remove dead copper, pour order 33): 37.213,21.6 38.949,19.864 40.759,19.864 41.109,20.214 40.499,20.214 39.964,20.749 39.833,20.749 39.449,20.364 39.149,20.364 37.649,21.864 37.649,22.164 38.049,22.564 38.049,22.664 37.713,23 36.185,23 36.1,22.915 36.1,21.9 36.4,21.6
P2V5 on Top Layer "P2V5_L01_P029" (solid, remove dead copper, pour order 29): 40.66,17.15 40.31,17.5 38.5,17.5 35.9,14.9 35.9,14.2 36.3,13.8 36.7,13.8 37.6,14.7 37.6,14.8 37.2,15.2 37.2,15.5 38.7,17 38.9,17 39.4,16.5 39.7,16.5 40.35,17.15
P1V1 on Top Layer "P1V1_L01_P026" (solid, remove dead copper, pour order 26): 34.66,18.398 34.462,18.2 33.5,18.2 33.3,18.4 33.3,19.5 33.5,19.7 37.3,19.7 38.1,18.9 40.9,18.9 41,18.8 41,18.5 40.9,18.4 37.2,18.4 37.2,19.1 37.1,19.2 34.8,19.2 34.66,19.06
P1V1 on Top Layer "P1V1_L01_P023" (solid, remove dead copper, pour order 23): 52.5,18.6 52.5,18.9 52.8,19.2 53.1,19.2 53.2,19.3 53.2,19.6 53,19.8 50.3,19.8 49.15,18.65 49.35,18.65 49.6,18.4 50.1,18.4 50.1,18.9 50.4,19.2 51.6,19.2 52,18.8 52,18.6
P3V3 on Top Layer "P3V3_L01_P022" (solid, remove dead copper, pour order 22): 54.2,35.4 55,36.2 55,38.2 53.1,40.1 53.1,43.9 53.4,44.2 54.9,44.2 55.1,44 55.1,40.3 55.1,39.5 56.5,38.1 56.5,33.6 56.2,33.3 54.6,33.3 54.2,33.7
P1V1 on Top Layer "P1V1_L01_P020" (solid, remove dead copper, pour order 20): 122.3,59.9 122,59.6 120.7,59.6 120.4,59.9 120.4,64.2 120.7,64.5 122.1,64.5 122.3,64.3
P1V8 on Top Layer "P1V8_L01_P019" (solid, remove dead copper, pour order 19): 135.5,60.6 135.2,60.9 135.2,64.1 135.4,64.3 136.6,64.3 137.1,63.8 137.1,60.8 136.9,60.6
P2V5 on Top Layer "P2V5_L01_P018" (solid, remove dead copper, pour order 18): 137.5,52.4 137.7,52.6 138.6,52.6 138.9,52.3 138.9,49.1 138.7,48.9 137.1,48.9 136.8,49.2 136.8,50.3 137.5,51
P3V3_SoM on Top Layer "P3V3_SOM_L01_P012" (solid, remove dead copper, pour order 12): 92.1,3.7 92.1,5.2 74.1,5.2 74,5.1 73.8,5.1 71.7,7.2 69.3,7.2 65.8,3.7 49.7,3.7 49.3,3.3 49.3,2.2 49.6,1.9 66.8,1.9 70.6,5.7 71.6,5.7 73.6,3.7
GND on Top Layer "GND_L01_P011" (solid, remove dead copper, pour order 11): 132.5,49.9 132.5,43.8 132.7,43.6 134.9,43.6 135.4,44.1 135.4,49.4 134.3,50.5 132.5,50.5 132.3,50.3 132.3,50.1
NetC47_2 on Top Layer "NETC47_2_L01_P010" (solid, remove dead copper, pour order 10): 127.8,60.542 127.638,60.704 126.896,60.704 126.7,60.9 126.7,64.5 126.5,64.7 123.2,64.7 122.9,64.4 122.9,62.8 123.1,62.6 124.3,62.6 124.8,62.1 124.8,61.4 125.6,60.6 126.2,60.6 126.6,60.2 126.977,60.2 127.15,60.027 127.15,59.6 127.8,59.6
GND on Top Layer "GND_L01_P008" (solid, remove dead copper, pour order 8): 127.5,55.5 127.6,55.6 127.6,56.5 125,56.5 124.5,56 123,56 122.3,56.7 121.3,56.7 120.9,56.3 120.9,54.7 121.261,54.339 124.639,54.339 125.8,55.5
NetC57_2 on Top Layer "NETC57_2_L01_P009" (solid, remove dead copper, pour order 9): 126.7,53.2 126.6,53.1 125.3,53.1 125.1,52.9 124.2,52.9 123.7,52.4 123.7,51.1 123.3,50.7 121.7,50.7 121.5,50.9 121.5,54 121.6,54.1 124.8,54.1 125.9,55.2 126.929,55.2 127,55.129 127,54.6 126.7,54.3
NetC53_2 on Top Layer "NETC53_2_L01_P007" (solid, remove dead copper, pour order 7): 131.9,60 130.9,60 130.9,64.4 131.1,64.6 133.4,64.6 134.6,63.4 134.6,60.9 134.3,60.6 133.4,60.6 133.2,60.8 132.1,60.8 131.9,60.6
GND on Top Layer "GND_L01_P006" (solid, remove dead copper, pour order 6): 128.6,51.6 127.7,51.6 127.5,51.4 125.8,51.4 125.6,51.2 125.6,50.2 126.2,49.6 126.7,49.6 127,49.3 127,47.6 127.2,47.4 129,47.4 129.3,47.7 129.3,51.465 129.145,51.62
GND on Top Layer "GND_L01_P005" (solid, remove dead copper, pour order 5): 126.5,58.27 126.5,59.913 126.112,60.3 124.7,60.3 124.4,60 124.4,58.44 124.569,58.27 125.45,58.27
GND on Top Layer "GND_L01_P004" (solid, remove dead copper, pour order 4): 130.2,65.3 127.6,65.3 127.2,64.9 127.2,61.1 127.4,60.9 127.7,60.9 128.4,60.2 128.463,60.263 130.563,60.263 130.7,60.4 130.7,64.8 130.6,64.9 130.7,64.8 130.6,64.9
GND on Top Layer "GND_L01_P003" (solid, remove dead copper, pour order 3): 133.9,56.2 133.6,55.9 131.8,55.9 131.6,56.1 131.6,57.2 131.8,57.4 132.9,57.4 132.9,57.8 131.8,57.8 131.6,58 131.6,58.5 131.8,58.7 133.1,58.7 133.3,58.9 133.3,60.3 133,60.6 132.5,60.6 132.2,60.3 132.2,59.1 132,58.9 127.4,58.9 127.2,58.7 127.2,54.6 127.4,54.4 131.4,54.4 131.6,54.6 131.6,55.3 131.8,55.5 133.1,55.5 134.3,54.3 137.8,54.3 138,54.5 138,55.8 137.6,56.2
NetC55_2 on Top Layer "NETC55_2_L01_P002" (solid, remove dead copper, pour order 2): 135.4,51 135.4,51.9 135.1,52.2 133.2,52.2 132.2,53.2 132.2,54.3 131.9,54.6 131.9,55.2 133,55.2 134.1,54.1 137.5,54.1 137.7,53.9 137.7,53 137,52.3 137,51 136.6,50.6 135.8,50.6
P2V5 on Bottom Layer "Bottom Layer-P2V5 1" (solid, pour order 99): 139.9,19.5 139.9,50 138.9,51 137,51 136.1,50.1 136.1,21.5 127.7,13.1 127.7,3.5 128.6,2.6 130.2,2.6 131.2,3.6 131.2,10.8
P3V3_SoM on Bottom Layer "P3V3_SOM_L04_P091" (solid, pour order 91): 86.2,53.9 86.8,54.5 90.8,54.5 91.3,54 91.3,38.2 90.5,37.4 90.5,23.8 89.3,22.6 89.3,20 88.4,19.1 88.4,12.3 91,9.7 91,4.3 90.3,3.6 87.9,3.6 87.5,4 87.5,9.2 85,11.7 85,32.9 86.6,34.5 86.6,44 86.2,44.4
P1V1 on Bottom Layer "P1V1_L04_P085" (solid, pour order 85): 53.1,19 53.2,19.1 53.2,20 51.4,21.8 51.4,23.3 51.8,23.7 51.8,32.1 47.4,36.5 47.4,45.2 44.5,48.1 44.5,57.6 43.8,58.3 42,58.3 41.6,57.9 41.6,47 44.6,44 44.6,35.6 48.9,31.3 48.9,20.4 50.3,19
P12V0 on Bottom Layer "P12V0_L04_P073" (solid, pour order 73): 100.5,26.5 101,27 101,32.8 98.6,35.2 98.6,46.7 98.2,47.1 95.4,47.1 95.1,46.8 95.1,29.6 96.2,28.5 98,28.5 98.5,28 98.5,26.7 98.7,26.5
P1V8 on Bottom Layer "Bottom Layer-P1V8" (solid, pour order 68): 27.6,26.9 28.3,27.6 28.3,28.4 24.9,31.8 24.9,52.2 23.1,54 23.1,61.8 22.8,62.1 21.1,62.1 20.8,61.8 20.8,53.1 22.5,51.4 22.5,30.6 26.2,26.9
NetC39_2 on Bottom Layer "NETC39_2_L04_P055" (solid, remove dead copper, pour order 55): 6.9,59.7 6.9,53.7 7.7,52.9 8.8,52.9 9,53.1 9,59.7 8.7,60 7.2,60
P2V5 on Bottom Layer "Bottom Layer-P2V5" (solid, remove dead copper, pour order 54): 35.8,6.9 36.2,6.5 38,6.5 38.4,6.9 38.4,13.6 37.6,14.4 37.6,23.5 38.3,24.2 38.3,25.1 37.9,25.5 36.5,25.5 36.1,25.1 36.1,15.3 35.8,15
P1V8 on Bottom Layer "Bottom Layer-P1V8 1" (solid, remove dead copper, pour order 49): 41.6,13.3 41.8,13.5 41.8,14.995 40.5,16.295 40.5,27.3 39.2,28.6 38.4,28.6 37.9,28.1 37.9,26.7 38.5,26.1 38.5,24 38,23.5 38,14.7 39.4,13.3
P1V1 on Bottom Layer "P1V1_L04_P027" (solid, remove dead copper, pour order 27): 35.3,19.369 34.131,18.2 33.5,18.2 33.3,18.4 33.3,19.9 33.9,20.5 33.9,25.5 34.2,25.8 35,25.8 35.3,25.5
P3V3_SoM on Bottom Layer "P3V3_SOM_L04_P017" (solid, remove dead copper, pour order 17): 51.4,2.2 51.1,1.9 49.6,1.9 49.45,2.05 49.45,14.598 52.36,17.508 52.892,17.508 53.3,17.1 53.3,16.3 51.4,14.4 51.4,3.8
P1V1 on Layer 2 "P1V1_L03_P058" (solid, remove dead copper, pour order 58): 122.1,61.3 122.4,61 122.4,58.9 122.1,58.6 108.4,58.6 104,54.2 43.6,54.2 41.6,56.2 41.6,57.7 42.2,58.3 102.7,58.3 105.7,61.3
P3V3 on Layer 2 "P3V3_L03_P052" (solid, pour order 52): 98.7,28.4 98.7,26.5 97.4,25.2 85.3,25.2 80.206,30.294 57.306,30.294 54.5,33.1 54.5,35.3 54.7,35.5 56.1,35.5 56.5,35.1 56.5,33.9 57.2,33.2 81.2,33.2 86.8,27.6 95.7,27.6 96.7,28.6 98.5,28.6
P1V8 on Layer 2 "Layer 2-P1V8" (solid, pour order 43): 32.6,59.5 33.5,58.6 102.6,58.6 105.6,61.6 124.1,61.6 126.7,59 131,59 134.2,62.2 136.9,62.2 137.3,62.6 137.3,64 136.9,64.4 133.7,64.4 130.1,60.8 128.092,60.8 125.192,63.7 103.9,63.7 100.9,60.7 91.7,60.7 90.5,61.9 34.1,61.9 32.1,63.9 22.7,63.9 20.5,61.7 20.5,59.5 20.9,59.1 22.5,59.1 22.9,59.5 22.9,61 23.7,61.8 30.3,61.8
GND on Layer 2 "Layer 2-GND" (solid, remove dead copper, pour order 72): 1.5,0.5 140,0.5 140.5,1 140.5,64.5 139.5,65.5 2,65.5 0.5,64 0.5,1.5
P2V5 on Layer 2 "P2V5_L03_P063" (solid, remove dead copper, pour order 63): 131.7,5.3 131.7,2.1 130.9,1.3 54.9,1.3 49.6,6.6 36.1,6.6 35.8,6.9 35.8,7.7 36.2,8.1 50.6,8.1 52.8,5.9 131.1,5.9
GND on Layer 1 "GND_L02_P028" (solid, remove dead copper, pour order 28): 0.972,0.98 139.972,0.98 139.972,64.98 0.972,64.98
P1V1 on Layer 1 "P1V1_L02_P025" (solid, remove dead copper, pour order 25): 51.4,27 43.2,27 42,25.8 34.2,25.8 33.8,25.4 33.8,24.7 34.1,24.4 50.7,24.4 51.8,25.5 51.8,26.6

## Keep-outs
Keep-Out Layer:
  circle w0.254: c27.797,18.04 r2.368
  circle w0.254: c28,58 r2.368
  circle w0.254: c110.2,37 r2.368
  lines w0.2: 0,-0.04 141.1,-0.04 141.1,65.8 0,65.8 0,47 1,47 2.274,47 cw(c2.274,46.574) 2.7,46.574 2.7,31.026 cw(c2.274,31.026) 2.274,30.6 1,30.6 0,30.6 0,-0.04

## Silkscreen, mask and mechanical layers (free items; w line width, h text height)
Top Overlay:
  circle w0.5: c43.3,43.595 r0.72
  circle w0.5: c43.3,33.995 r0.72
  circle w0.5: c43.3,38.795 r0.72
  circle w0.254: c27.797,18.04 r3.5
  circle w0.254: c28,58 r3.5
  circle w0.254: c110.2,37 r3.5
  region: 43.2,34.789 43.211,34.789 cw(c43.211,33.9) 44.1,33.9 44.8,33.9 44.8,43.7 43.9,43.7 43.9,43.501 cw(c43.2,43.501) 43.2,42.801 43.2,39.589 cw(c43.2,38.789) 44,38.789 44,38.7 cw(c43.301,38.7) 43.301,38.001 43.2,38.001
  region: 43.4,34.789 43.389,34.789 ccw(c43.389,33.9) 42.5,33.9 41.8,33.9 41.8,43.7 42.7,43.7 42.7,43.501 ccw(c43.4,43.501) 43.4,42.801 43.4,39.589 ccw(c43.4,38.789) 42.6,38.789 42.6,38.7 ccw(c43.299,38.7) 43.299,38.001 43.4,38.001
  lines w0.1: 125.1,13.5 125.1,10.4 ccw(c125.5,10.4) 125.5,10
  lines w0.15: 126.7,50.2 127.029,50.529 ccw(c126.859,50.7) 127.1,50.7 ; 133.2,53.5 133.559,53.141 cw(c133.217,52.8) 133.7,52.8
Mechanical 1:
  lines w0.1: 0,-0.04 ccw(c0,-0.04) 0,-0.04 ; 0,-0.04 0,30.6 1,30.6 ; 0,-0.04 141.1,-0.04 141.1,65.8 0,65.8 0,47 1,47 2.274,47 cw(c2.274,46.574) 2.7,46.574 2.7,31.026 cw(c2.274,31.026) 2.274,30.6 1,30.6 ; 1,30.6 ccw(c1,30.6) 1,30.6

## Text inside footprints (layer, text, board x,y; h text height)
IC2: Drill Drawing "This part footprint uses \"soldermask defined\" pads, do not increase/decrease soldermask aperture in this area" at 60.604,26.604 h1.52 r315
IC4: Drill Drawing "soldermask defined pads,  / do not increase/decrease  / soldermask aperture in this area" at 143.05,67.278 h1.2 r180
J7: Top Overlay "6" at 133.465,12.545 h1 r90; Mechanical 14 "6" at 133.465,12.545 h1 r90
J9: Top Overlay "1" at 50.75,58.6 h1 r180; Top Overlay "8" at 58.65,58.6 h1 r180; Top Overlay "S" at 58.95,51.6 h1 r180; Top Overlay "G" at 54.95,51.6 h1 r180; Top Overlay "S" at 51.05,51.6 h1 r180; Top Overlay "G" at 49.25,51.6 h1 r180